# EAGLE board TwixBC_0.5 (EAGLE 5.06)

Size 160 x 100 mm. Coordinates in mm from the lower left corner, seen from the top.
Outline: 0,0 160,0 160,100 0,100 0,0
Copper layers (1*16): Top 0.035mm / dielectric 1.5mm / Bottom 0.035mm
Design rules "default": minimum track width 10mil, minimum drill 24mil, track to track 8mil, track to pad 8mil, pad to pad 8mil, via to via 8mil, smd to smd 8mil, copper to edge 40mil, drill to drill 8mil, minimum pad ring 10mil, minimum via ring 8mil, stop-mask expansion 4mil, vias tented up to drill 0mil, thermal gap 10mil

## Footprints (pad centres in the part's own frame; a part is rotated, then mirrored left to right if it is on the bottom)
2X04 = drill 1.016 octagon: 1 -3.81,-1.27; 2 -3.81,1.27; 3 -1.27,-1.27; 4 -1.27,1.27; 5 1.27,-1.27; 6 1.27,1.27; 7 3.81,-1.27; 8 3.81,1.27
1X04 = drill 1.016 long: 1 -3.81,0; 2 -1.27,0; 3 1.27,0; 4 3.81,0
DIL08 = drill 0.813 long: 1 -3.81,-3.81; 2 -1.27,-3.81; 3 1.27,-3.81; 4 3.81,-3.81; 5 3.81,3.81; 6 1.27,3.81; 7 -1.27,3.81; 8 -3.81,3.81
ML14 = drill 0.914 octagon: 1 -7.62,-1.27; 2 -7.62,1.27; 3 -5.08,-1.27; 4 -5.08,1.27; 5 -2.54,-1.27; 6 -2.54,1.27; 7 0,-1.27; 8 0,1.27; 9 2.54,-1.27; 10 2.54,1.27; 11 5.08,-1.27; 12 5.08,1.27; 13 7.62,-1.27; 14 7.62,1.27
F061.100 = drill 1.4 pad 2.54 long: A1 -2.5,0; A2 2.5,0
1X12 = drill 1.016 long: 1 -13.97,0; 2 -11.43,0; 3 -8.89,0; 4 -6.35,0; 5 -3.81,0; 6 -1.27,0; 7 1.27,0; 8 3.81,0; 9 6.35,0; 10 8.89,0; 11 11.43,0; 12 13.97,0
F4052 = drill 1.321 long: 1 -3.81,3.81; 2 -3.81,-3.81; O1 11.43,-3.81; O2 11.43,3.81; P1 16.51,-3.81; P2 16.51,3.81; S1 21.59,-3.81; S2 21.59,3.81
C1206 = smd 1.6 x 1.8: 1 -1.4,0; 2 1.4,0
E2,5-5 = drill 0.813 pad 1.6 round: + -1.27,0 | drill 0.813 pad 1.6 octagon: - 1.27,0
E7,5-18 = drill 1.016 pad 3.15 round: + -3.81,0 | drill 1.016 pad 3.15 octagon: - 3.81,0
1751248 = drill 1.1 pad 1.7 round: 1 -1.75,-0.1; 2 1.75,-0.1
C4111-15 = drill 1.499 long: A 7.62,0; C -7.62,0
DO201-15 = drill 1.499 long: A 7.62,0; C -7.62,0
SOT23 = smd 1 x 1.4: 1 -0.95,-1.1; 2 0.95,-1.1; 3 0,1.1
SOD80C = smd 1.4 x 1.8: A 1.7,0; C -1.7,0
NMA = drill 0.813 long: 1 0,6.35; 2 0,3.81; 4 0,-1.27; 5 0,-3.81; 6 0,-6.35
DIL40 = drill 0.813 long: 1 -24.13,-7.62; 2 -21.59,-7.62; 3 -19.05,-7.62; 4 -16.51,-7.62; 5 -13.97,-7.62; 6 -11.43,-7.62; 7 -8.89,-7.62; 8 -6.35,-7.62; 9 -3.81,-7.62; 10 -1.27,-7.62; 11 1.27,-7.62; 12 3.81,-7.62; 13 6.35,-7.62; 14 8.89,-7.62; 15 11.43,-7.62; 16 13.97,-7.62; 17 16.51,-7.62; 18 19.05,-7.62; 19 21.59,-7.62; 20 24.13,-7.62; 21 24.13,7.62; 22 21.59,7.62; 23 19.05,7.62; 24 16.51,7.62; 25 13.97,7.62; 26 11.43,7.62; 27 8.89,7.62; 28 6.35,7.62; 29 3.81,7.62; 30 1.27,7.62; 31 -1.27,7.62; 32 -3.81,7.62; 33 -6.35,7.62; 34 -8.89,7.62; 35 -11.43,7.62; 36 -13.97,7.62; 37 -16.51,7.62; 38 -19.05,7.62; 39 -21.59,7.62; 40 -24.13,7.62
TO220V = drill 1.016 long: 1 -2.54,-2.54; 2 0,-2.54; 3 2.54,-2.54
79XXL = drill 1.016 long: GND -2.54,-3.81; IN 0,-3.81; OUT 2.54,-3.81 | hole 3.302: 0,11.176
78XXS = drill 1.016 long: GND 0,-2.54; IN -2.54,-2.54; OUT 2.54,-2.54
SO08 = smd 0.6 x 2.2: 1 -1.905,-2.6; 2 -0.635,-2.6; 3 0.635,-2.6; 4 1.905,-2.6; 5 1.905,2.6; 6 0.635,2.6; 7 -0.635,2.6; 8 -1.905,2.6
SO16W = smd 0.6 x 2.2: 1 -4.445,-4.6; 2 -3.175,-4.6; 3 -1.905,-4.6; 4 -0.635,-4.6; 5 0.635,-4.6; 6 1.905,-4.6; 7 3.175,-4.6; 8 4.445,-4.6; 9 4.445,4.6; 10 3.175,4.6; 11 1.905,4.6; 12 0.635,4.6; 13 -0.635,4.6; 14 -1.905,4.6; 15 -3.175,4.6; 16 -4.445,4.6
1X01 = drill 1.016 octagon: 1 0,0
L3225M = smd 1.6 x 2.2: 1 -1.4,0; 2 1.4,0
CHIP-LED0805 = smd 1.2 x 1.2: A 0,-1.05; C 0,1.05
DIL16 = drill 0.813 offset: 1 -8.89,-3.81; 2 -6.35,-3.81; 3 -3.81,-3.81; 4 -1.27,-3.81; 5 1.27,-3.81; 6 3.81,-3.81; 7 6.35,-3.81; 8 8.89,-3.81; 9 8.89,3.81; 10 6.35,3.81; 11 3.81,3.81; 12 1.27,3.81; 13 -1.27,3.81; 14 -3.81,3.81; 15 -6.35,3.81; 16 -8.89,3.81
R1206 = smd 1.6 x 1.803: 1 -1.422,0; 2 1.422,0
Q = drill 0.61 long: 1 -2.54,-7.62; 2 2.54,-7.62
TC26V = drill 0.813 round: 1 -1.27,0; 2 1.27,0
SOT23-BEC = smd 1 x 1.4: B -0.95,-1.1; C 0,1.1; E 0.95,-1.1
M1206 = smd 1.6 x 2: 1 -1.4,0; 2 1.4,0
MINI_MELF-0207W = smd 2.4 x 2.5: 1 -2.6,0; 2 2.6,0
KH208-8 = drill 1.016 pad 2.54 octagon: 1 -15.875,0; 2 15.875,0
R_5W = drill 0.813 pad 2.184 octagon: 1 0.46,0; 2 28.08,0
794681-4 = drill 1 pad 1.778 round: 1 1.5,-1.5; 2 1.5,1.5; 3 -1.5,-1.5; 4 -1.5,1.5 | hole 2.4: 3.63,0; -3.67,0
SO8 = smd 1.524 x 0.61: 1 1.067,4.445; 2 1.067,3.175; 3 1.067,1.905; 4 1.067,0.635; 5 6.553,0.635; 6 6.553,1.905; 7 6.553,3.175; 8 6.553,4.445 | smd 0.61 x 1.524: 9 6.635,3.703; 10 6.635,1.203
1X03 = drill 1.016 long: 1 -2.54,0; 2 0,0; 3 2.54,0
SSOP48 = smd 0.3 x 1.25: P$1 0,0.5; P$2 0.5,0.5; P$3 1,0.5; P$4 1.5,0.5; P$5 2,0.5; P$6 2.5,0.5; P$7 3,0.5; P$8 3.5,0.5; P$9 4,0.5; P$10 4.5,0.5; P$11 5,0.5; P$12 5.5,0.5; P$13 6,0.5; P$14 6.5,0.5; P$15 7,0.5; P$16 7.5,0.5; P$17 8,0.5; P$18 8.5,0.5; P$19 9,0.5; P$20 9.5,0.5; P$21 10,0.5; P$22 10.5,0.5; P$23 10.5,7.5; P$24 10,7.5; P$25 9.5,7.5; P$26 9,7.5; P$27 8.5,7.5; P$28 8,7.5; P$29 7.5,7.5; P$30 7,7.5; P$31 6.5,7.5; P$32 6,7.5; P$33 5.5,7.5; P$34 5,7.5; P$35 4.5,7.5; P$36 4,7.5; P$37 3.5,7.5; P$38 3,7.5; P$39 2.5,7.5; P$40 2,7.5; P$41 1.5,7.5; P$42 1,7.5; P$43 0.5,7.5; P$44 0,7.5
S08 = smd 0.6 x 2.2: 1 0.635,1.21; 2 1.905,1.21; 3 3.175,1.21; 4 4.445,1.21; 5 4.445,6.41; 6 3.175,6.41; 7 1.905,6.41; 8 0.635,6.41
SO16 = smd 0.6 x 2.2: 1 1.905,1.75; 2 3.175,1.75; 3 4.445,1.75; 4 5.715,1.75; 5 6.985,1.75; 6 8.255,1.75; 7 9.525,1.75; 8 10.795,1.75; 9 10.795,10.95; 10 9.525,10.95; 11 8.255,10.95; 12 6.985,10.95; 13 5.715,10.95; 14 4.445,10.95; 15 3.175,10.95; 16 1.905,10.95
RDH/15 = drill 1.016 octagon: 1 -7.62,0; 2 7.62,0
GND-GNDA = smd 1.27 x 1.27: GND -1.27,0; GNDA 1.27,0

## Placement (x,y rotation side)
A_SEL  [2X04]  87.63,72.39 0 top
A_SEL2  [1X04]  102.87,72.39 0 top
AD627  AD627  [DIL08]  288.29,181.61 0 top  (outside the outline)
AUX_CON  [ML14]  212.09,257.81 0 top  (outside the outline)
BAT+  PIN2F061.100  [F061.100]  113.03,260.35 0 top  (outside the outline)
BAT-  PIN2F061.100  [F061.100]  113.03,252.73 0 top  (outside the outline)
BAT_CON  [1X12]  289.56,57.15 0 top  (outside the outline)
BAT_RELAY  4052  [F4052]  83.82,229.87 0 top  (outside the outline)
C1  18p  [C1206]  151.13,187.96 0 top  (outside the outline)
C2  18p  [C1206]  151.13,180.34 0 top  (outside the outline)
C3  100n  [C1206]  -129.54,-10.16 0 top  (outside the outline)
C4  100n  [C1206]  125.73,154.94 0 top  (outside the outline)
C5  100n  [C1206]  125.73,138.43 0 top  (outside the outline)
C6  100n  [C1206]  128.27,127 0 top  (outside the outline)
C7  100n  [C1206]  105.41,154.94 0 top  (outside the outline)
C8  100n  [C1206]  105.41,139.7 0 top  (outside the outline)
C9  100n  [C1206]  105.41,124.46 0 top  (outside the outline)
C10  10u  [E2,5-5]  91.44,123.19 0 top  (outside the outline)
C11  10u  [E2,5-5]  93.98,158.75 0 top  (outside the outline)
C12  100n  [C1206]  106.68,95.25 0 top
C13  100n  [C1206]  128.27,95.25 0 top
C14  100n  [C1206]  83.82,99.06 0 top
C15  100n  [C1206]  93.98,180.34 0 top  (outside the outline)
C16  100n  [C1206]  125.73,173.99 0 top  (outside the outline)
C17  100n  [C1206]  292.1,196.85 0 top  (outside the outline)
C18  100n  [C1206]  292.1,166.37 0 top  (outside the outline)
C19  100n  [C1206]  236.22,177.8 0 top  (outside the outline)
C20  100n  [C1206]  231.14,189.23 0 top  (outside the outline)
C_BUF  [E7,5-18]  60.96,143.51 0 top  (outside the outline)
C_REF  1u  [C1206]  99.06,40.64 0 top
C_REG  1u  [C1206]  105.41,44.45 0 top
CF1  100n  [C1206]  190.5,17.78 0 top  (outside the outline)
CF2  100n  [C1206]  190.5,33.02 0 top  (outside the outline)
CF3  100n  [C1206]  190.5,64.77 0 top  (outside the outline)
CF4  100n  [C1206]  190.5,80.01 0 top  (outside the outline)
CF5  100n  [C1206]  190.5,109.22 0 top  (outside the outline)
CF6  100n  [C1206]  190.5,124.46 0 top  (outside the outline)
CF7  100n  [C1206]  190.5,152.4 0 top  (outside the outline)
CF8  100n  [C1206]  190.5,167.64 0 top  (outside the outline)
CF9  100n  [C1206]  190.5,196.85 0 top  (outside the outline)
CF10  100n  [C1206]  190.5,212.09 0 top  (outside the outline)
CF11  100n  [C1206]  190.5,240.03 0 top  (outside the outline)
CF12  100n  [C1206]  190.5,255.27 0 top  (outside the outline)
CHARGE_PLUG  1751248  [1751248]  156.21,267.97 0 top  (outside the outline)
CHARGE_RELAY  4052  [F4052]  132.08,229.87 0 top  (outside the outline)
D1  1N5908  [C4111-15]  52.07,146.05 0 top  (outside the outline)
D2  HV_DIODE  [DO201-15]  90.17,294.64 0 top  (outside the outline)
D3  BAS40-06  [SOT23]  259.08,177.8 0 top  (outside the outline)
D4  [SOD80C]  238.76,40.64 0 top  (outside the outline)
D5  [SOD80C]  250.19,41.91 0 top  (outside the outline)
D6  [SOD80C]  238.76,86.36 0 top  (outside the outline)
D7  [SOD80C]  250.19,87.63 0 top  (outside the outline)
D8  [SOD80C]  238.76,129.54 0 top  (outside the outline)
D9  [SOD80C]  250.19,132.08 0 top  (outside the outline)
D10  [SOD80C]  238.76,129.54 0 top  (outside the outline)
D11  [SOD80C]  238.76,173.99 0 top  (outside the outline)
D12  [SOD80C]  250.19,175.26 0 top  (outside the outline)
D13  [SOD80C]  238.76,217.17 0 top  (outside the outline)
D14  [SOD80C]  250.19,219.71 0 top  (outside the outline)
D15  [SOD80C]  238.76,217.17 0 top  (outside the outline)
D16  [SOD80C]  238.76,261.62 0 top  (outside the outline)
D17  [SOD80C]  238.76,261.62 0 top  (outside the outline)
D18  [SOD80C]  250.19,262.89 0 top  (outside the outline)
DC1  12-12  [NMA]  86.36,142.24 0 top  (outside the outline)
IC1  MEGA32-P  [DIL40]  186.69,158.75 0 top  (outside the outline)
IC3  7805TV  [TO220V]  116.84,142.24 0 top  (outside the outline)
IC4  TS7905L  [79XXL]  116.84,123.19 0 top  (outside the outline)
IC5  TS7805  [78XXS]  116.84,158.75 0 top  (outside the outline)
IC6  [SO08]  106.68,180.34 0 top  (outside the outline)
IC7  ADM2483  [SO16W]  87.63,86.36 0 top
IC8  7805TV  [TO220V]  116.84,99.06 0 top
JP1  [1X01]  289.56,72.39 0 top  (outside the outline)
L1  [L3225M]  116.84,191.77 0 top  (outside the outline)
LED1  [CHIP-LED0805]  205.74,200.66 0 top  (outside the outline)
MAINS+  PIN2F061.100  [F061.100]  67.31,260.35 0 top  (outside the outline)
MAINS-  PIN2F061.100  [F061.100]  67.31,252.73 0 top  (outside the outline)
OK2  ILQ1  [DIL16]  67.31,215.9 0 top  (outside the outline)
PULLUP  10k  [R1206]  -129.54,-3.81 0 top  (outside the outline)
Q1  16Mhz  [Q]  160.02,184.15 0 top  (outside the outline)
Q2  32678 kHz  [TC26V]  280.67,130.81 0 top  (outside the outline)
Q3  BC817-16SMD  [SOT23-BEC]  82.55,214.63 0 top  (outside the outline)
Q4  BC817-16SMD  [SOT23-BEC]  129.54,214.63 0 top  (outside the outline)
Q5  BC817-16SMD  [SOT23-BEC]  208.28,214.63 0 top  (outside the outline)
Q6  BC817-16SMD  [SOT23-BEC]  171.45,214.63 0 top  (outside the outline)
R1  390  [M1206]  205.74,195.58 0 top  (outside the outline)
R2  120  [M1206]  110.49,78.74 0 top
R7  17k8  [M1206]  299.72,181.61 0 top  (outside the outline)
R8  10k  [M1206]  243.84,181.61 0 top  (outside the outline)
R9  10k  [M1206]  238.76,135.89 0 top  (outside the outline)
R10  10k  [M1206]  276.86,138.43 0 top  (outside the outline)
R11  10k  [M1206]  217.17,132.08 0 top  (outside the outline)
R12  10k  [M1206]  217.17,130.81 0 top  (outside the outline)
R13  10k  [M1206]  166.37,191.77 0 top  (outside the outline)
R14  2M  [MINI_MELF-0207W]  223.52,199.39 0 top  (outside the outline)
R15  10k  [MINI_MELF-0207W]  223.52,191.77 0 top  (outside the outline)
R16  390  [M1206]  59.69,222.25 0 top  (outside the outline)
R17  390  [M1206]  106.68,222.25 0 top  (outside the outline)
R18  390  [M1206]  148.59,222.25 0 top  (outside the outline)
R19  390  [M1206]  185.42,222.25 0 top  (outside the outline)
R_SHUNT  0.005  [KH208-8]  93.98,252.73 0 top  (outside the outline)
RF1  100  [R1206]  200.66,22.86 0 top  (outside the outline)
RF2  100  [R1206]  200.66,38.1 0 top  (outside the outline)
RF3  100  [R1206]  200.66,71.12 0 top  (outside the outline)
RF4  100  [R1206]  200.66,86.36 0 top  (outside the outline)
RF5  100  [R1206]  200.66,114.3 0 top  (outside the outline)
RF6  100  [R1206]  200.66,129.54 0 top  (outside the outline)
RF7  100  [R1206]  200.66,158.75 0 top  (outside the outline)
RF8  100  [R1206]  200.66,173.99 0 top  (outside the outline)
RF9  100  [R1206]  200.66,201.93 0 top  (outside the outline)
RF10  100  [R1206]  200.66,217.17 0 top  (outside the outline)
RF11  100  [R1206]  200.66,246.38 0 top  (outside the outline)
RF12  100  [R1206]  200.66,261.62 0 top  (outside the outline)
RF13  3k3  [R1206]  232.41,40.64 0 top  (outside the outline)
RF14  3k3  [R1206]  243.84,41.91 0 top  (outside the outline)
RF15  3k3  [R1206]  232.41,86.36 0 top  (outside the outline)
RF16  3k3  [R1206]  243.84,87.63 0 top  (outside the outline)
RF17  3k3  [R1206]  232.41,129.54 0 top  (outside the outline)
RF18  3k3  [R1206]  243.84,132.08 0 top  (outside the outline)
RF19  3k3  [R1206]  232.41,173.99 0 top  (outside the outline)
RF20  3k3  [R1206]  243.84,175.26 0 top  (outside the outline)
RF21  3k3  [R1206]  232.41,217.17 0 top  (outside the outline)
RF22  3k3  [R1206]  243.84,219.71 0 top  (outside the outline)
RF23  3k3  [R1206]  232.41,261.62 0 top  (outside the outline)
RF24  3k3  [R1206]  243.84,262.89 0 top  (outside the outline)
RL1  R_5W  [R_5W]  240.03,25.4 0 top  (outside the outline)
RL2  R_5W  [R_5W]  251.46,25.4 0 top  (outside the outline)
RL3  R_5W  [R_5W]  240.03,72.39 0 top  (outside the outline)
RL4  R_5W  [R_5W]  251.46,72.39 0 top  (outside the outline)
RL5  R_5W  [R_5W]  240.03,116.84 0 top  (outside the outline)
RL6  R_5W  [R_5W]  251.46,116.84 0 top  (outside the outline)
RL7  R_5W  [R_5W]  240.03,160.02 0 top  (outside the outline)
RL8  R_5W  [R_5W]  251.46,160.02 0 top  (outside the outline)
RL9  R_5W  [R_5W]  240.03,204.47 0 top  (outside the outline)
RL10  R_5W  [R_5W]  251.46,204.47 0 top  (outside the outline)
RL11  R_5W  [R_5W]  240.03,247.65 0 top  (outside the outline)
RL12  R_5W  [R_5W]  251.46,247.65 0 top  (outside the outline)
RS485_CON  794681-4  [794681-4]  129.54,78.74 0 top
T1  IRF_7104  [SO8]  236.22,29.21 0 top  (outside the outline)
T2  IRF_7104  [SO8]  236.22,76.2 0 top  (outside the outline)
T3  IRF_7104  [SO8]  236.22,120.65 0 top  (outside the outline)
T4  IRF_7104  [SO8]  236.22,163.83 0 top  (outside the outline)
T5  IRF_7104  [SO8]  236.22,208.28 0 top  (outside the outline)
T6  IRF_7104  [SO8]  236.22,251.46 0 top  (outside the outline)
TEMP_CON  [1X03]  93.98,36.83 0 top
TO_TWIKE  1751248  [1751248]  156.21,271.78 0 top  (outside the outline)
U$1  LTC6802-2  [SSOP48]  57.15,57.15 0 top
U$2  DS1629  [S08]  246.38,124.46 0 top  (outside the outline)
U$3  ADUM1401  [SO16]  44.45,129.54 0 top  (outside the outline)
VORLADE_R  [RDH/15]  87.63,299.72 0 top  (outside the outline)
~NUDEV~1  GND-GNDA  [GND-GNDA]  -130.81,137.16 0 top  (outside the outline)

## Library data of the parts
A_SEL A_SEL2 BAT_CON JP1 TEMP_CON = pinhead
AD627 = analog-devices
AUX_CON = con-ml
BAT+ BAT- MAINS+ MAINS- = con-faston
BAT_RELAY CHARGE_RELAY = relay
C1-C20 C_BUF C_REF C_REG CF1-CF12 L1 PULLUP R1 R2 R7-R13 R16-R19 RF1-RF24 VORLADE_R = rcl
CHARGE_PLUG TO_TWIKE = con-phoenix-350
D1-D18 = diode
DC1 = dc-dc-converter
IC1 = atmel
IC3 IC8 = linear
IC4 IC5 = v-reg
IC6 IC7 = Libs_Markus
LED1 = led
OK2 = optocoupler
Q1 = special
Q2 = crystal
Q3-Q6 = transistor-npn
R14 R15 = resistor
R_SHUNT = resistor-power
RL1-RL12 = R_Power
RS485_CON = con-amp
T1-T6 = IRF_7104
U$1 = LTC6802
U$2 = DS1629
U$3 = ADuM1401
~NUDEV~1 = supply1

## Nets
+5V: C_REG.1 PULLUP.1 U$1.P$31 U$1.P$33 U$3.16
A0: A_SEL.8 U$1.P$37
A1: A_SEL.6 U$1.P$38
A2: A_SEL.4 U$1.P$39
A3: A_SEL.2 U$1.P$40
ASD: RL5.1 T3.7
AUX: AUX_CON.12 OK2.10 Q5.C
AUX_EN: IC1.28 R19.1
BAT_RELAY_EN: IC1.1 R16.1
BK2: BAT_CON.2 CF2.2 D4.C RF1.1 RL2.2 T1.1
BK3: BAT_CON.3 CF3.2 D5.C RF2.1 RL3.2 T1.3
BK4: BAT_CON.4 CF4.2 D6.C RF3.1 RL4.2 T2.1
BK5: BAT_CON.5 CF5.2 D7.C RF4.1 RL5.2 T2.3
BK6: BAT_CON.6 CF6.2 D8.C D10.C RF5.1 RL6.2 T3.1
BK7: BAT_CON.7 CF7.2 D9.C RF6.1 RL7.2 T3.3
BK8: BAT_CON.8 CF8.2 D11.C RF7.1 RL8.2 T4.1
BK9: BAT_CON.9 CF9.2 D12.C RF8.1 RL9.2 T4.3
BK10: BAT_CON.10 CF10.2 D13.C D15.C RF9.1 RL10.2 T5.1
BK11: BAT_CON.11 CF11.2 D14.C RF10.1 RL11.2 T5.3
BK12: BAT_CON.12 CF12.2 D16.C D17.C RF11.1 RL12.2 T6.1
BUT_1: AUX_CON.9 IC1.16 R12.1
BUT_2: AUX_CON.10 IC1.17 R11.1
C1: CF1.1 RF1.2 U$1.P$24
C2: CF2.1 RF2.2 U$1.P$22
C3: CF3.1 RF3.2 U$1.P$20
C4: CF4.1 RF4.2 U$1.P$18
C5: CF5.1 RF5.2 U$1.P$16
C6: CF6.1 RF6.2 U$1.P$14
C7: CF7.1 RF7.2 U$1.P$12
C8: CF8.1 RF8.2 U$1.P$10
C9: CF9.1 RF9.2 U$1.P$8
C10: CF10.1 RF10.2 U$1.P$6
C11: CF11.1 RF11.2 U$1.P$4
C12: CF12.1 RF12.2 U$1.P$2
CHARGE_RELAY_EN: IC1.3 R17.1
CS: IC1.5 U$3.3
CSBI: U$1.P$44 U$3.14
DISP_DB4: AUX_CON.5 IC1.18
DISP_DB5: AUX_CON.6 IC1.19
DISP_DB6: AUX_CON.7 IC1.20
DISP_DB7: AUX_CON.8 IC1.21
DISP_EN_PWR: AUX_CON.4 IC1.26
DISP_RS: AUX_CON.2 IC1.24
DISP_RW: AUX_CON.3 IC1.25
GND: AUX_CON.1 C1.1 C3.1 C4.1 C7.1 C12.1 C13.1 C14.1 DC1.5 IC1.11 IC5.GND IC7.8 IC8.2 LED1.C OK2.2 OK2.3 OK2.6 OK2.7 U$2.4 U$3.2 U$3.8 ~NUDEV~1.GND
GNDA: C5.1 C6.1 C8.1 C9.2 C10.+ C11.- C15.1 C16.1 C17.1 C18.1 C19.1 C20.1 D3.3 IC1.31 IC3.2 IC4.GND IC6.4 MAINS-.A1 R15.1 R_SHUNT.1 ~NUDEV~1.GNDA
GPIO1: PULLUP.2 U$1.P$35 U$3.10
IGBT_EN: IC1.2
ISO_EN: IC1.29 U$3.7
MAINS+: BAT_RELAY.S1 BAT_RELAY.S2 D2.C MAINS+.A1 R14.2 VORLADE_R.1
MISO: IC1.7 U$3.6
MOSI: IC1.6 U$3.5
N$1: IC1.33 R1.1
N$2: TEMP_CON.1 U$1.P$29
N$3: C_REF.1 U$1.P$30
N$4: TEMP_CON.2 U$1.P$28
N$5: RL3.1 T2.7
N$6: RL4.1 T2.5
N$7: C2.1
N$8: RL1.1 T1.7
N$9: RL2.1 T1.5
N$10: RL6.1 T3.5
N$11: RL7.1 T4.7
N$12: RL8.1 T4.5
N$13: RL9.1 T5.7
N$14: RL10.1 T5.5
N$15: RL11.1 T6.7
N$16: RL12.1 T6.5
N$17: D4.A RF13.1 T1.2
N$18: C1.2 IC1.12 Q1.2
N$22: C2.2 IC1.13 Q1.1
N$23: D5.A RF14.1 T1.4
N$24: BAT+.A1 BAT+.A2 BAT_RELAY.P1 BAT_RELAY.P2 D2.A VORLADE_R.2
N$25: BAT_RELAY.2 OK2.15 Q3.C
N$26: IC7.12 R2.2 RS485_CON.3
N$27: IC7.13 R2.1 RS485_CON.4
N$28: C12.2 IC7.16 IC8.3
N$29: C15.2 IC1.30 IC6.2 IC6.3 L1.2
N$30: AD627.6 D3.1 D3.2 R8.1
N$31: C7.2 C8.2 C11.+ DC1.6 IC3.1 IC5.IN
N$32: C9.1 C10.- DC1.4 IC4.IN
N$33: AD627.1 R7.2
N$34: AD627.8 R7.1
N$35: C19.2 IC1.37 IC1.39 R8.2
N$36: R10.2 U$2.7
N$37: R9.2 U$2.3
N$38: IC1.9 R13.1
N$39: C20.2 IC1.36 R14.1 R15.2
N$40: Q2.2 U$2.6
N$41: Q2.1 U$2.5
N$42: OK2.16 Q3.B
N$43: OK2.1 R16.2
N$44: OK2.4 R17.2
N$45: CHARGE_PLUG.1 CHARGE_RELAY.P1
N$46: CHARGE_PLUG.2 CHARGE_RELAY.P2
N$47: CHARGE_RELAY.2 OK2.14 Q4.C
N$48: CHARGE_RELAY.O1 TO_TWIKE.1
N$49: CHARGE_RELAY.O2 TO_TWIKE.2
N$50: OK2.5 R18.2
N$51: RS485_CON.1
N$52: OK2.8 R19.2
N$53: LED1.A R1.2
N$54: OK2.9 Q5.B
N$55: D6.A RF15.1 T2.2
N$56: D7.A RF16.1 T2.4
N$57: D8.A D10.A RF17.1 T3.2
N$58: D11.A RF19.1 T4.2
N$59: D9.A RF18.1 T3.4
N$60: D12.A RF20.1 T4.4
N$61: D13.A D15.A RF21.1 T5.2
N$62: D14.A RF22.1 T5.4
N$63: D16.A D17.A RF23.1 T6.2
N$64: D18.A RF24.1 T6.4
N$65: OK2.12 Q6.B
NOTAUS: AUX_CON.11 OK2.11 Q6.C
NOTAUS_EN: IC1.27 R18.1
RS485_INPUT_DE: IC1.4 IC7.4 IC7.5
RXD: IC1.14 IC7.3
S1: RF13.2 U$1.P$25
S2: RF14.2 U$1.P$23
S3: RF15.2 U$1.P$21
S4: RF16.2 U$1.P$19
S5: RF17.2 U$1.P$17
S6: RF18.2 U$1.P$15
S7: RF19.2 U$1.P$13
S8: RF20.2 U$1.P$11
S9: RF21.2 U$1.P$9
S10: RF22.2 U$1.P$7
S11: RF23.2 U$1.P$5
S12: RF24.2 U$1.P$3
SCK: IC1.8 U$3.4
SCKI: U$1.P$41 U$3.13
SCL: IC1.22 U$2.2
SDA: IC1.23 U$2.1
SDI: U$1.P$42 U$3.12
SDO: U$1.P$43 U$3.11
TWIKE_DCDC+: D1.A RS485_CON.2
TWIKE_DCDC-: AUX_CON.13 C_BUF.- DC1.2 IC7.9 OK2.13 Q3.E Q4.B Q4.E Q5.E Q6.E
TWIKE_DCDC_BUF: AUX_CON.14 BAT_RELAY.1 C13.2 C_BUF.+ CHARGE_RELAY.1 D1.C DC1.1 IC8.1
TXD: IC1.15 IC7.6
U_REF: AD627.5 C16.2 IC1.32 IC1.38 IC1.40 IC6.6
U_SHUNT: BAT-.A1 R_SHUNT.2
V+: D18.C JP1.1 RF12.1 T6.3 U$1.P$1
V-: A_SEL.1 A_SEL.3 A_SEL.5 A_SEL.7 BAT_CON.1 C_REF.2 C_REG.2 CF1.2 RL1.2 TEMP_CON.3 U$1.P$26 U$1.P$27 U$1.P$32 U$3.9 U$3.15
VCC: A_SEL2.1 A_SEL2.2 A_SEL2.3 A_SEL2.4 AD627.7 C3.2 C4.2 C14.2 C17.2 IC1.10 IC5.OUT IC7.1 IC7.7 R9.1 R10.1 R11.2 R12.2 R13.2 U$2.8 U$3.1
VDD: C5.2 IC3.3 L1.1
VSS: AD627.4 C6.2 C18.2 IC4.OUT

## Tracks (layer width: path | path; a pad name or v marks a point on that pad's centre or on a via)
+5V  (4 unrouted)
A0  (1 unrouted)
A1  (1 unrouted)
A2  (1 unrouted)
A3  (1 unrouted)
ASD  (1 unrouted)
AUX  (2 unrouted)
AUX_EN  (1 unrouted)
BAT_RELAY_EN  (1 unrouted)
BK2  (5 unrouted)
BK3  (5 unrouted)
BK4  (5 unrouted)
BK5  (5 unrouted)
BK6  (6 unrouted)
BK7  (5 unrouted)
BK8  (5 unrouted)
BK9  (5 unrouted)
BK10  (6 unrouted)
BK11  (5 unrouted)
BK12  (6 unrouted)
BUT_1  (2 unrouted)
BUT_2  (2 unrouted)
C1  (2 unrouted)
C2  (2 unrouted)
C3  (2 unrouted)
C4  (2 unrouted)
C5  (2 unrouted)
C6  (2 unrouted)
C7  (2 unrouted)
C8  (2 unrouted)
C9  (2 unrouted)
C10  (2 unrouted)
C11  (2 unrouted)
C12  (2 unrouted)
CHARGE_RELAY_EN  (1 unrouted)
CS  (1 unrouted)
CSBI  (1 unrouted)
DISP_DB4  (1 unrouted)
DISP_DB5  (1 unrouted)
DISP_DB6  (1 unrouted)
DISP_DB7  (1 unrouted)
DISP_EN_PWR  (1 unrouted)
DISP_RS  (1 unrouted)
DISP_RW  (1 unrouted)
GND  (21 unrouted)
GNDA  (20 unrouted)
GPIO1  (2 unrouted)
ISO_EN  (1 unrouted)
MAINS+  (5 unrouted)
MISO  (1 unrouted)
MOSI  (1 unrouted)
N$1  (1 unrouted)
N$2  (1 unrouted)
N$3  (1 unrouted)
N$4  (1 unrouted)
N$5  (1 unrouted)
N$6  (1 unrouted)
N$8  (1 unrouted)
N$9  (1 unrouted)
N$10  (1 unrouted)
N$11  (1 unrouted)
N$12  (1 unrouted)
N$13  (1 unrouted)
N$14  (1 unrouted)
N$15  (1 unrouted)
N$16  (1 unrouted)
N$17  (2 unrouted)
N$18  (2 unrouted)
N$22  (2 unrouted)
N$23  (2 unrouted)
N$24  (5 unrouted)
N$25  (2 unrouted)
N$26  (2 unrouted)
N$27  (2 unrouted)
N$28  (2 unrouted)
N$29  (4 unrouted)
N$30  (3 unrouted)
N$31  (5 unrouted)
N$32  (3 unrouted)
N$33  (1 unrouted)
N$34  (1 unrouted)
N$35  (3 unrouted)
N$36  (1 unrouted)
N$37  (1 unrouted)
N$38  (1 unrouted)
N$39  (3 unrouted)
N$40  (1 unrouted)
N$41  (1 unrouted)
N$42  (1 unrouted)
N$43  (1 unrouted)
N$44  (1 unrouted)
N$45  (1 unrouted)
N$46  (1 unrouted)
N$47  (2 unrouted)
N$48  (1 unrouted)
N$49  (1 unrouted)
N$50  (1 unrouted)
N$52  (1 unrouted)
N$53  (1 unrouted)
N$54  (1 unrouted)
N$55  (2 unrouted)
N$56  (2 unrouted)
N$57  (3 unrouted)
N$58  (2 unrouted)
N$59  (2 unrouted)
N$60  (2 unrouted)
N$61  (3 unrouted)
N$62  (2 unrouted)
N$63  (3 unrouted)
N$64  (2 unrouted)
N$65  (1 unrouted)
NOTAUS  (2 unrouted)
NOTAUS_EN  (1 unrouted)
RS485_INPUT_DE  (2 unrouted)
RXD  (1 unrouted)
S1  (1 unrouted)
S2  (1 unrouted)
S3  (1 unrouted)
S4  (1 unrouted)
S5  (1 unrouted)
S6  (1 unrouted)
S7  (1 unrouted)
S8  (1 unrouted)
S9  (1 unrouted)
S10  (1 unrouted)
S11  (1 unrouted)
S12  (1 unrouted)
SCK  (1 unrouted)
SCKI  (1 unrouted)
SCL  (1 unrouted)
SDA  (1 unrouted)
SDI  (1 unrouted)
SDO  (1 unrouted)
TWIKE_DCDC+  (1 unrouted)
TWIKE_DCDC-  (9 unrouted)
TWIKE_DCDC_BUF  (7 unrouted)
TXD  (1 unrouted)
U_REF  (5 unrouted)
U_SHUNT  (1 unrouted)
V+  (4 unrouted)
V-  (14 unrouted)
VCC  (19 unrouted)
VDD  (2 unrouted)
VSS  (3 unrouted)